# Altium PCB jlink.pcbdoc
Units mil, origin at the board's own origin, x right, y up, seen from the top; angles counter-clockwise.
Board outline 3196.03 x 1868.28 mil, 2 copper layers (Top Layer, Bottom Layer); 29 components, 28 nets, 136 pads, 16 vias.
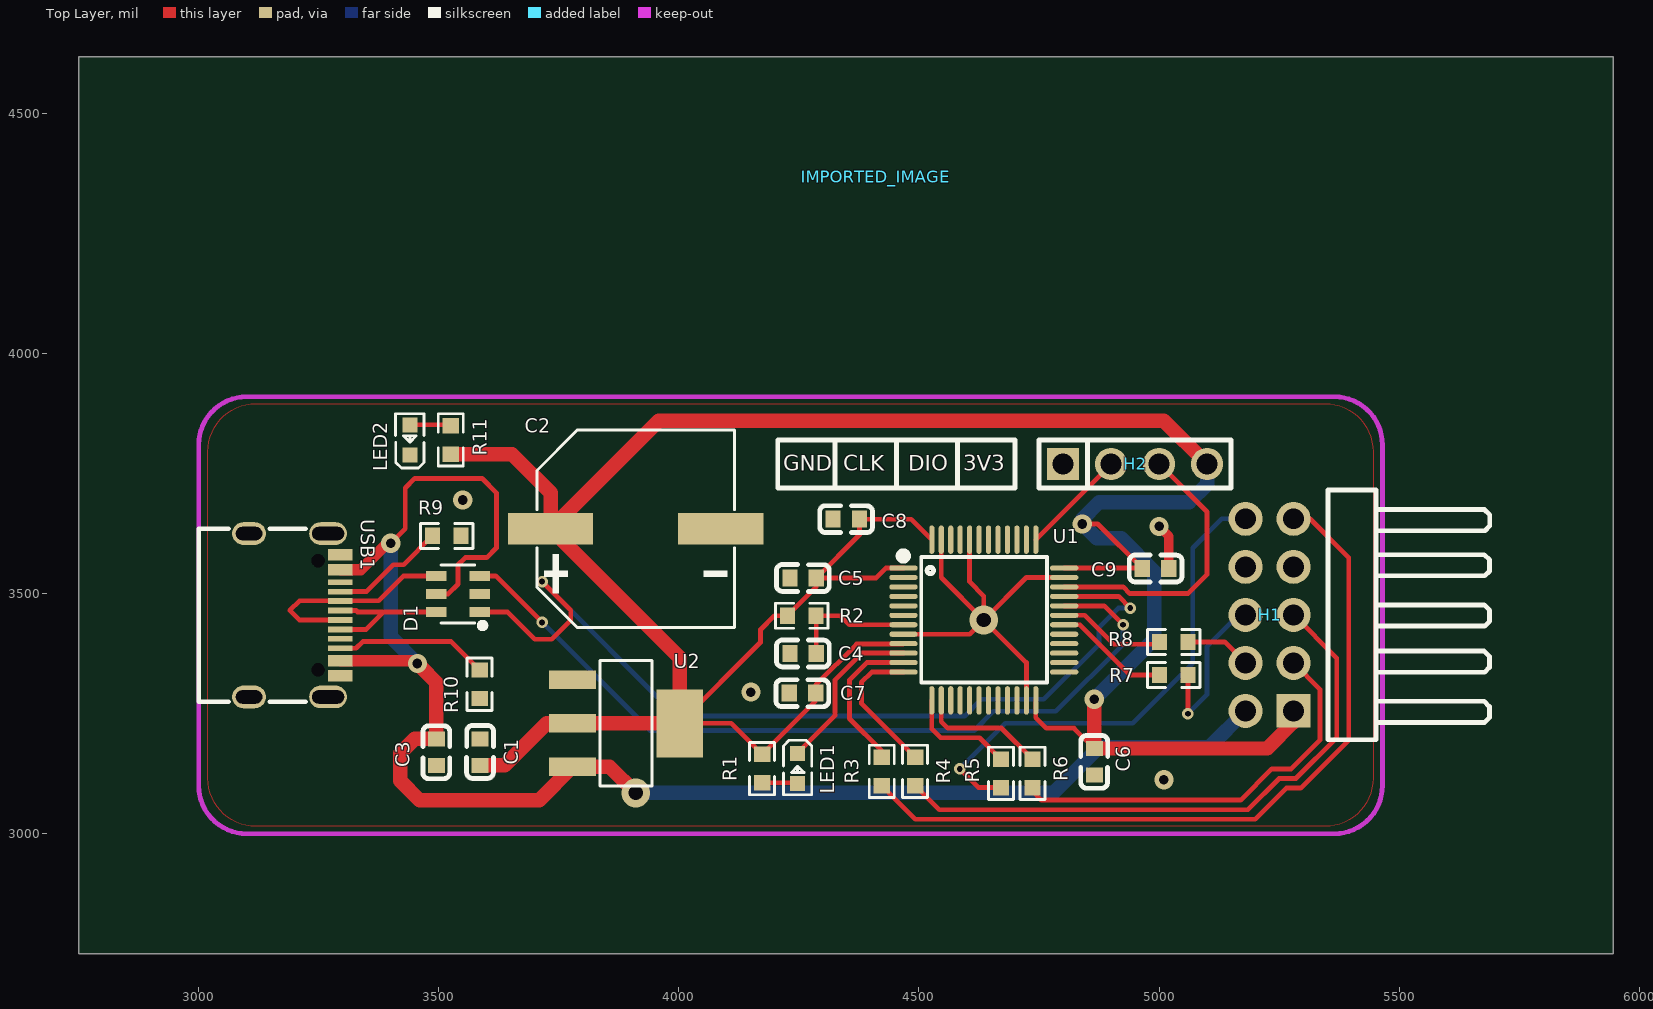
[diagram p0: Top Layer view]
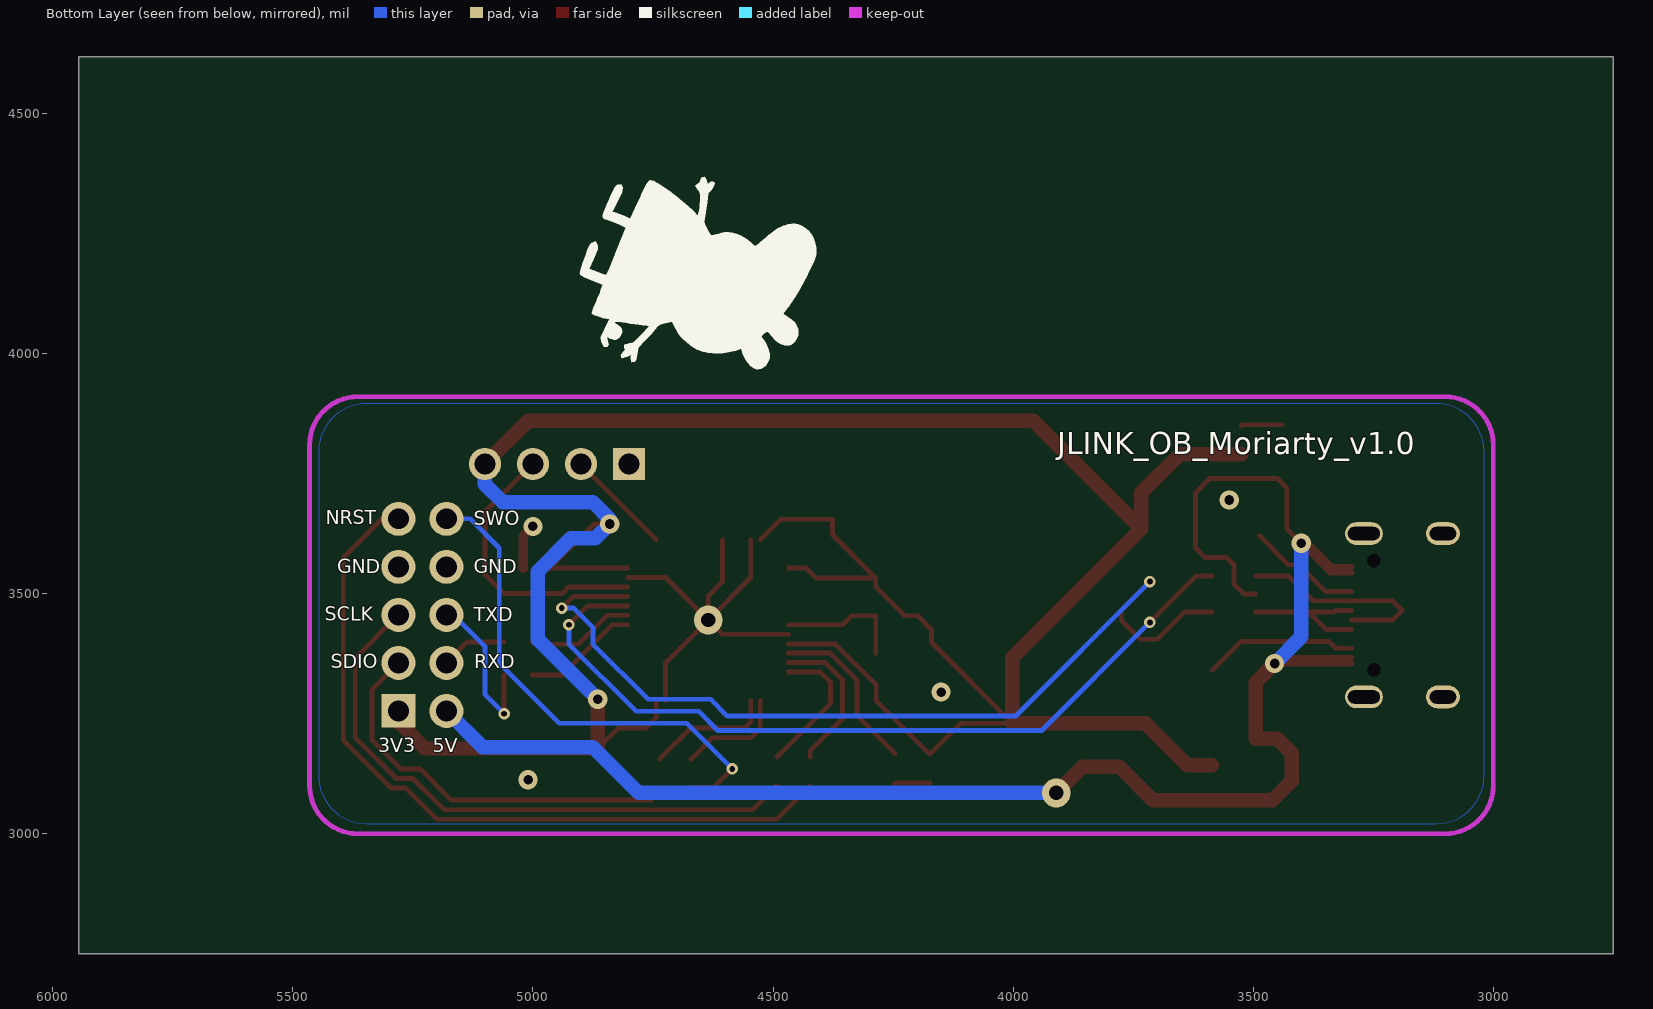
[diagram p1: Bottom Layer view, seen from below]

## Layer stack, top to bottom
Top Layer: signal copper (thickness not stored)
Dielectric: dielectric 12.6, FR-4, Dk 4.8
Bottom Layer: signal copper (thickness not stored)

## Board outline
5946.03,2750 2750,2750 2750,4618.28 5946.03,4618.28

## Components (designator, comment, footprint, x,y, rotation, side; value= is the part's Value field where it differs from the comment)
C1 "CC0603KRX7R9BB104" C0603 3585.84,3170 r270 top
C2 "UWT1H221MNL1GS" CAP-SMD_BD10.0-L10.3-W10.3-LS11.3-FD 3910,3635 r0 top
C3 "CC0603KRX7R9BB104" C0603 3495,3170 r90 top
C4 "CC0603KRX7R9BB104" C0603 4258.59,3375.2 r0 top
C5 "0603B105K250NT" C0603 4258.59,3532.36 r0 top
C6 "CC0603KRX7R9BB104" C0603 4865,3150 r90 top
C7 "CC0603KRX7R9BB104" C0603 4257.44,3292.56 r0 top
C8 "CC0603KRX7R9BB104" C0603 4348.59,3655 r0 top
C9 "CC0603KRX7R9BB104" C0603 4992.56,3552.44 r180 top
D1 "USBLC6-2SC6_C2827654" SOT-23-6_L2.9-W1.6-P0.95-LS2.8-BL 3539.99,3499.37 r90 top
H1 "PZ254R-12-10P" HDR-TH_10P-P2.54-H-M-R2-C5-S2.54 5230,3455.73 r90 top
H2 "PZ254V-11-04P" HDR-TH_4P-P2.54-V-M 4950,3770 r0 top
IMPORTED_IMAGE "IMPORTED_IMAGE" IMPORTED_IMAGE 4409.74,4368.28 r0 top
LED1 "NCD0603W1" LED0603-RD 4246.97,3135.87 r270 top
LED2 "NCD0603G1" LED0603-RD 3440,3820 r90 top
R1 "0603WAF1001T5E" R0603 4173.31,3135.7 r90 top
R2 "0603WAF1002T5E" R0603 4255.79,3453.89 r180 top
R3 "0603WAF1000T5E" R0603 4422.42,3129.78 r270 top
R4 "0603WAF1000T5E" R0603 4491.98,3129.78 r270 top
R5 "0603WAF1000T5E" R0603 4670.67,3125.66 r270 top
R6 "0603WAF1000T5E" R0603 4736.54,3125.66 r270 top
R7 "0603WAF1000T5E" R0603 5030.37,3330.5 r0 top
R8 "0603WAF1000T5E" R0603 5030.37,3399.39 r0 top
R9 "0603WAF4701T5E" R0603 3516.48,3620.22 r0 top
R10 "0603WAF4701T5E" R0603 3585,3311.11 r90 top
R11 "0603WAF1001T5E" R0603 3525,3820 r270 top
U1 "STM32F072C8T6" LQFP-48_L7.0-W7.0-P0.50-LS9.0-BL 4635,3445 r270 top
U2 "AMS1117-3.3_C347222" SOT-223-4_L6.5-W3.5-P2.30-LS7.0-BR 3890,3230 r180 top
USB1 "KH-TYPE-C-16P" USB-C-SMD_KH-TYPE-C-16P 3200,3455 r270 top

## Footprints (in the part's own frame and the unit in brackets; to place one, negate y for a bottom-side part, rotate by r counter-clockwise, add the part's x,y. Pads: shape width x height; smd on the part's side, far side on the other; paste and mask are expansions set on the pad)
C0603 [mm]
  rect 0.8x0.9 smd mask+0.051: 1(-0.7,0) 2(0.7,0)
  silkscreen extent -1.41,-0.71 1.39,0.72
CAP-SMD_BD10.0-L10.3-W10.3-LS11.3-FD [mm]
  rect 4.5x1.65 smd mask+0.051: 1(-4.5,0) 2(4.5,0)
  silkscreen extent -5.23,-5.23 5.23,5.23
HDR-TH_4P-P2.54-V-M [mm]
  rect 1.7x1.7 hole 1.1 mask+0.051: 1(-3.81,0)
  round 1.7 hole 1.1 mask+0.051: 2(-1.27,0) 3(1.27,0) 4(3.81,0)
  silkscreen extent -5.08,-1.27 5.08,1.27
HDR-TH_10P-P2.54-H-M-R2-C5-S2.54 [mm]
  rect 1.778x1.8 hole 1.1 mask+0.051: 1(-5.08,-1.27)
  round 1.8 hole 1.1 mask+0.051: 2(-5.08,1.27) 3(-2.54,-1.27) 4(-2.54,1.27) 5(0,-1.27) 6(0,1.27) 7(2.54,-1.27) 8(2.54,1.27) 9(5.08,-1.27) 10(5.08,1.27)
  silkscreen extent -6.6,-11.65 6.6,-3.09
IMPORTED_IMAGE [mil]
LED0603-RD [mm]
  rect 0.8x0.8 smd mask+0.051: 1(-0.799,-0.003) 2(0.799,0.003)
  silkscreen extent -1.49,-0.75 1.39,0.76
LQFP-48_L7.0-W7.0-P0.50-LS9.0-BL [mm]
  oval 0.27x1.5 smd paste+0 mask+0.05: 1(-2.75,-4.25) 2(-2.25,-4.25) 3(-1.75,-4.25) 4(-1.25,-4.25) 5(-0.75,-4.25) 6(-0.25,-4.25) 7(0.25,-4.25) 8(0.75,-4.25) 9(1.25,-4.25) 10(1.75,-4.25) 11(2.25,-4.25) 12(2.75,-4.25) 25(2.75,4.25) 26(2.25,4.25) 27(1.75,4.25) 28(1.25,4.25) 29(0.75,4.25) 30(0.25,4.25) 31(-0.25,4.25) 32(-0.75,4.25) 33(-1.25,4.25) 34(-1.75,4.25) 35(-2.25,4.25) 36(-2.75,4.25)
  oval 1.5x0.27 smd paste+0 mask+0.05: 13(4.25,-2.75) 14(4.25,-2.25) 15(4.25,-1.75) 16(4.25,-1.25) 17(4.25,-0.75) 18(4.25,-0.25) 19(4.25,0.25) 20(4.25,0.75) 21(4.25,1.25) 22(4.25,1.75) 23(4.25,2.25) 24(4.25,2.75) 37(-4.25,2.75) 38(-4.25,2.25) 39(-4.25,1.75) 40(-4.25,1.25) 41(-4.25,0.75) 42(-4.25,0.25) 43(-4.25,-0.25) 44(-4.25,-0.75) 45(-4.25,-1.25) 46(-4.25,-1.75) 47(-4.25,-2.25) 48(-4.25,-2.75)
  silkscreen extent -3.59,-4.46 3.3,3.34
R0603 [mil]
  rect 31.75x34.02 smd paste-3937.01 mask+2: 1(-29.66,0) 2(29.66,0)
  silkscreen extent -55,-26 55,26
SOT-23-6_L2.9-W1.6-P0.95-LS2.8-BL [mil]
  rect 20.95x42.2 smd mask+2: 1(-37.4,-45.24) 2(0,-45.24) 3(37.4,-45.24) 4(37.4,45.24) 5(0,45.24) 6(-37.4,45.24)
  silkscreen extent -72,-57 61,35
SOT-223-4_L6.5-W3.5-P2.30-LS7.0-BR [mm]
  rect 2.47x0.98 smd mask+0.051: 1(2.835,-2.3) 2(2.835,0) 3(2.835,2.3)
  rect 2.47x3.6 smd mask+0.051: 4(-2.835,0)
  silkscreen extent -1.37,-3.33 1.37,3.33
USB-C-SMD_KH-TYPE-C-16P [mm]
  oval 1.2x2 hole 0.7 slot 1.7 at 90 deg mask+0.051: 1(-4.32,1.765) 2(4.32,1.765)
  oval 1.2x1.8 hole 0.7 slot 1.4 at 90 deg mask+0.051: 3(-4.32,-2.415) 4(4.32,-2.415)
  rect 0.3x1.3 smd paste-100 mask+0.05: A1(-3.35,2.415) A4(-2.55,2.415) A5(-1.25,2.415) A6(-0.25,2.415) A7(0.25,2.415) A8(1.25,2.415) A9(2.55,2.415) A12(3.35,2.415) B1(3.05,2.415) B4(2.25,2.415) B5(1.75,2.415) B6(0.75,2.415) B7(-0.75,2.415) B8(-1.75,2.415) B9(-2.25,2.415) B12(-3.05,2.415)
  Multi-Layer board cut-out: -2.89,1.585 -3.042,1.55 -3.164,1.453 -3.231,1.313 -3.231,1.157 -3.164,1.017 -3.042,0.92 -2.89,0.885 -2.89,0.885 -2.738,0.92 -2.616,1.017 -2.549,1.157 -2.549,1.313 -2.616,1.453 -2.738,1.55 -2.89,1.585
  Multi-Layer board cut-out: 2.89,1.585 2.738,1.55 2.616,1.453 2.549,1.313 2.549,1.157 2.616,1.017 2.738,0.92 2.89,0.885 2.89,0.885 3.042,0.92 3.164,1.017 3.231,1.157 3.231,1.313 3.164,1.453 3.042,1.55 2.89,1.585
  silkscreen extent -4.57,-5.08 4.57,0.57

## Via types
v1: diameter 40, hole 20, Top Layer to Bottom Layer, 8 vias
v2: diameter 24.02, hole 12.01, Top Layer to Bottom Layer, 6 vias
v3: diameter 60, hole 30, Top Layer to Bottom Layer, 2 vias

## Nets (pads, with @x,y where several pads share a name; then routed paths per layer and width w, separated by ;. In a path a pad name is that pad's centre, name@x,y a point inside that pad or via, vN(x,y) a via of type N, cw(c..) or ccw(c..) an arc to the next point about the centre after c; other vN are vias at no path point)
$1N1161: LED1.2 R1.1 | length 74.5
  Top Layer w10: R1.1 4245.45,3106.05 LED1.2
$1N1189: LED1.1 U1.10 | length 351
  Top Layer w10: LED1.1 4325,3245.52 4325,3320 4381.1,3376.1 U1.10
$1N1197: H2.2 U1.37 | length 222.6
  Top Layer w10: U1.37 4900,3769.05 H2.2
$1N1199: C4.2 R2.1 U1.7 | length 269.1
  Top Layer w10: C4.2 4286.15,3453.18 R2.1 4336.12,3453.89 4355,3435 4467.52,3435 U1.7
$1N1207: R3.1 U1.11 | length 316.2
  Top Layer w10: R3.1 4422.42,3172.59 4355,3240 4355,3320 4391.42,3356.42 U1.11
$1N1255: R10.2 USB1.B5 | length 320.2
  Top Layer w10: USB1.B5 3327.64,3386.1 3341.54,3400 3525.77,3400 R10.2
$1N1257: R9.1 USB1.A5 | length 239.8
  Top Layer w10: USB1.A5 3349.21,3504.21 3405,3560 3426.6,3560 R9.1
$1N1279: H2.3 U1.34 | length 591.4
  Top Layer w10: U1.34 4925,3513.9 4938.9,3500 5060,3500 5100,3540 5100,3670 H2.3
$1N1568: R4.1 U1.12 | length 298.6
  Top Layer w10: U1.12 4401.73,3336.73 4380,3315 4380,3271.42 R4.1
$1N1571: R5.1 U1.13 | length 229.4
  Top Layer w10: U1.13 4526.73,3218.27 4545,3200 4625.99,3200 R5.1
$1N1574: R6.1 U1.14 | length 266.6
  Top Layer w10: U1.14 4546.42,3233.58 4560,3220 4671.86,3220 R6.1
$1N1753: R7.1 U1.30 | length 241.7
  Top Layer w10: U1.30 4802.48,3435 4835,3435 4939.51,3330.5 R7.1
$1N1756: R8.1 U1.31 | length 225.5
  Top Layer w10: U1.31 4845.16,3454.84 4905.61,3394.39 4995.71,3394.39 R8.1
$1N1884: LED2.2 R11.1 | length 85.9
  Top Layer w10: LED2.2 3523.19,3851.47 R11.1
+3.3V: C1.2 C2.1 C5.2 C6.2 C7.2 C8.2 C9.2 H1.1 H2.4 R1.2 R2.2 R11.2 U1.1 U1.9 U1.24 U1.36 U1.48 U2.2 U2.4 | length 6269.6
  Top Layer w10: U1.9 4466.89,3395 4370,3395 4285,3310 C7.2 4285,3277.06 R1.2 4108.67,3230 U2.4 4170,3398.39 4170,3425 4198.89,3453.89 R2.2 4286.15,3513.91 C5.2 ; U1.1 4431.19,3553.27 4410.28,3532.36 C5.2 ; U1.48 4484.05,3655 C8.2 4376.15,3622.36 C5.2 ; U1.24 4743.27,3241.73 4765,3220 4822.56,3220 C6.2 ; U1.36 4963.88,3553.27 4964.71,3552.44 C9.2 4872.44,3645 v1(4840,3645)
  Top Layer w30: R11.2 3652.5,3790.34 3732.84,3710 C2.1 ; C1.2 3637.44,3142.44 3725,3230 U2.2 U2.4 4001.61,3366.23 C2.1 ; v1(4865,3280) C6.2 5225,3177.56 5280,3232.56 H1.1 ; H2.4 5010,3860 3957.84,3860 C2.1
  Bottom Layer w30: v1(4865,3280) 4990,3405 4990,3546.14 4921.15,3615 4870,3615 v1(4840,3645) 4840,3655 4875,3690 5062.43,3690 5100,3727.57 H2.4
+5V: C3.2 D1.5 H1.2 U2.3 USB1.A4 USB1.A9 USB1.B4 USB1.B9 | length 3713.2
  Top Layer w10: v1(3400,3605) 3430,3635 3430,3720 3450,3740 3590,3740 3620,3710 3620,3595 3600,3575 3555,3575 3540,3560 3540,3520 3519.38,3499.37 D1.5 ; v1(3455.4,3354.6) v1@3463.58,3346.42
  Top Layer w12: USB1.A9 v1(3455.4,3354.6) 3443.58,3366.42 USB1.B4 ; USB1.B9 3338.58,3543.58 v1(3400,3605) 3385,3605 3335.39,3555.39 USB1.A4
  Top Layer w30: v1@3463.58,3346.42 3495,3315 C3.2 3450,3197.56 3420,3167.56 3420,3110 3460,3070 3708.94,3070 U2.3 3855.55,3139.45 v3(3910,3085)
  Bottom Layer w30: v1(3400,3605) 3400,3410 v1(3455.4,3354.6) ; v3(3910,3085) 4780,3085 4875,3180 5104.27,3180 H1.2
DN: D1.4 USB1.A7 USB1.B7 | length 448.4
  Top Layer w10: USB1.A7 3209.84,3445.16 3190,3465 3210,3485 USB1.B7@3295.55,3485 ; USB1.B7 USB1.B7@3295.55,3485 ; D1.4 3426.78,3536.77 3375,3485 USB1.B7@3295.55,3485
DN_OUT: D1.3 U1.32 | length 1726.7
  Top Layer w10: D1.3 3618.23,3536.77 v2(3715,3440) ; U1.32 4885.47,3474.53 v2(4925,3435)
  Bottom Layer w10: v2(3715,3440) 3940,3215 4615,3215 4655,3255 4785,3255 4925,3395 v2(4925,3435)
DP: D1.6 USB1.A6 USB1.B6 | length 306.4
  Top Layer w10: USB1.B6 3348.96,3425.47 3385.47,3461.97 ; USB1.A6 3327.64,3464.84 3330.51,3461.97 3385.47,3461.97 ; D1.6 3385.47,3461.97
DP_OUT: D1.1 U1.33 | length 1937.2
  Top Layer w10: D1.1 3643.03,3461.97 3700,3405 3735,3405 3775,3445 3775,3465 v2(3715,3525) ; U1.33 4915.79,3494.21 v2(4940,3470)
  Bottom Layer w10: v2(3715,3525) 3995,3245 4595,3245 4630,3280 4760,3280 4875,3395 4875,3430 4915,3470 v2(4940,3470)
GND: C1.1 C2.2 C3.1 C4.1 C5.1 C6.1 C7.1 C8.1 C9.1 D1.2 H1.7 H1.8 H2.1 LED2.1 R9.2 R10.1 U1.8 U1.23 U1.35 U1.44 U1.47 U2.1 USB1.1 USB1.2 USB1.3 USB1.4 USB1.A1 USB1.A12 USB1.B1 USB1.B12 | length 1067
  Top Layer w10: U1.8 4605.47,3415.47 v3(4635,3445) ; U1.47 4546.42,3533.58 v3(4635,3445) ; U1.44 4605.47,3524.53 4635,3495 v3(4635,3445) ; U1.23 4723.58,3356.42 v3(4635,3445) ; U1.35 4723.58,3533.58 v3(4635,3445)
  Top Layer w20: v1(5000,3640) 5020.12,3619.88 C9.1
  other v1: 5010,3112.44 4150,3295 3550,3695
NRST: H1.9 R3.2 | length 1598.4
  Top Layer w10: R3.2 4492.54,3030 5200,3030 5265,3095 5295,3095 5395,3195 5395,3575 5314.27,3655.73 H1.9
RXD: H1.4 R8.2 | length 138.1
  Top Layer w10: R8.2 5136.35,3399.39 H1.4
SWCLK: H1.5 R4.2 | length 1253.9
  Top Layer w10: R4.2 4542.1,3050 5185,3050 5250,3115 5285,3115 5370,3200 5370,3365.73 H1.5
SWDIO: H1.3 R6.2 | length 848.9
  Top Layer w10: R6.2 4736.54,3088.47 4755,3070 5170,3070 5235,3135 5275,3135 5335,3195 5335,3300.73 H1.3
SWO: H1.10 R5.2 | length 1053.1
  Top Layer w10: v2(4585,3135) 4624,3096 R5.2
  Bottom Layer w10: v2(4585,3135) 4680,3230 4945,3230 5070,3355 5070,3595 5130.73,3655.73 H1.10
TXD: H1.6 R7.2 | length 344.3
  Top Layer w10: v2(5060,3250) R7.2
  Bottom Layer w10: v2(5060,3250) 5100,3290 5100,3390 5165.73,3455.73 H1.6
"": U1.2 U1.3 U1.4 U1.5 U1.6 U1.15 U1.16 U1.17 U1.18 U1.19 U1.20 U1.21 U1.22 U1.25 U1.26 U1.27 U1.28 U1.29 U1.38 U1.39 U1.40 U1.41 U1.42 U1.43 U1.45 U1.46 USB1.A8 USB1.B8

## Polygon pours and split planes (outlines as drawn)
GND on Top Layer (solid, remove dead copper, pour order 0): 3119.3,3895.73 5345.5,3895.73 cw(c5345.5,3795.73) 5445.5,3795.73 5445.5,3115.33 cw(c5345.5,3115.33) 5345.5,3015.33 3119.3,3015.33 cw(c3119.3,3115.33) 3019.3,3115.33 3019.3,3795.73 cw(c3119.3,3795.73)
GND on Bottom Layer (solid, remove dead copper, pour order 1): 3119.3,3895.69 5346.2,3895.69 cw(c5346.2,3795.69) 5446.2,3795.69 5446.2,3120.89 cw(c5346.2,3120.89) 5346.2,3020.89 3119.3,3020.89 cw(c3119.3,3120.89) 3019.3,3120.89 3019.3,3795.69 cw(c3119.3,3795.69)

## Keep-outs
Board Outline Layer:
  lines w10 net "": 3000,3100 ccw(c3100,3100) 3100,3000 5365,3000 ccw(c5365,3100) 5465,3100 5465,3810 ccw(c5365,3810) 5365,3910 3100,3910 ccw(c3100,3810) 3000,3810 3000,3100

## Silkscreen, mask and mechanical layers (free items; w line width, h text height)
Top Silkscreen Layer:
  lines w10 net "": 4325,3725 4325,3820 ; 4453,3720 4453,3820 ; 4580,3725 4580,3820 ; 4205.99,3720 4700,3720 4700,3820 4205.99,3820 4205.99,3720
  text "GND" at 4217.23,3756.1 h32.45
  text "CLK" at 4342.23,3756.1 h32.45
  text "DIO" at 4477.23,3756.1 h32.45
  text "3V3" at 4592.23,3756.1 h32.45
Bottom Silkscreen Layer:
  text "JLINK_OB_Moriarty_v1.0" at 3908.22,3790.54 h45.43
  text "NRST" at 5431.23,3644.99 h29.2
  text "SWO" at 5122.96,3642.49 h29.2
  text "GND" at 5122.96,3542.49 h29.2
  text "GND" at 5407.96,3542.49 h29.2
  text "SCLK" at 5433.17,3443.22 h29.2
  text "TXD" at 5122.96,3442.49 h29.2
  text "RXD" at 5122.51,3344.99 h29.2
  text "SDIO" at 5421.23,3344.99 h29.2
  text "5V" at 5208.79,3169.99 h29.2
  text "3V3" at 5322.51,3169.99 h29.2